# EAGLE board 02-PWR (EAGLE 9.6.2)
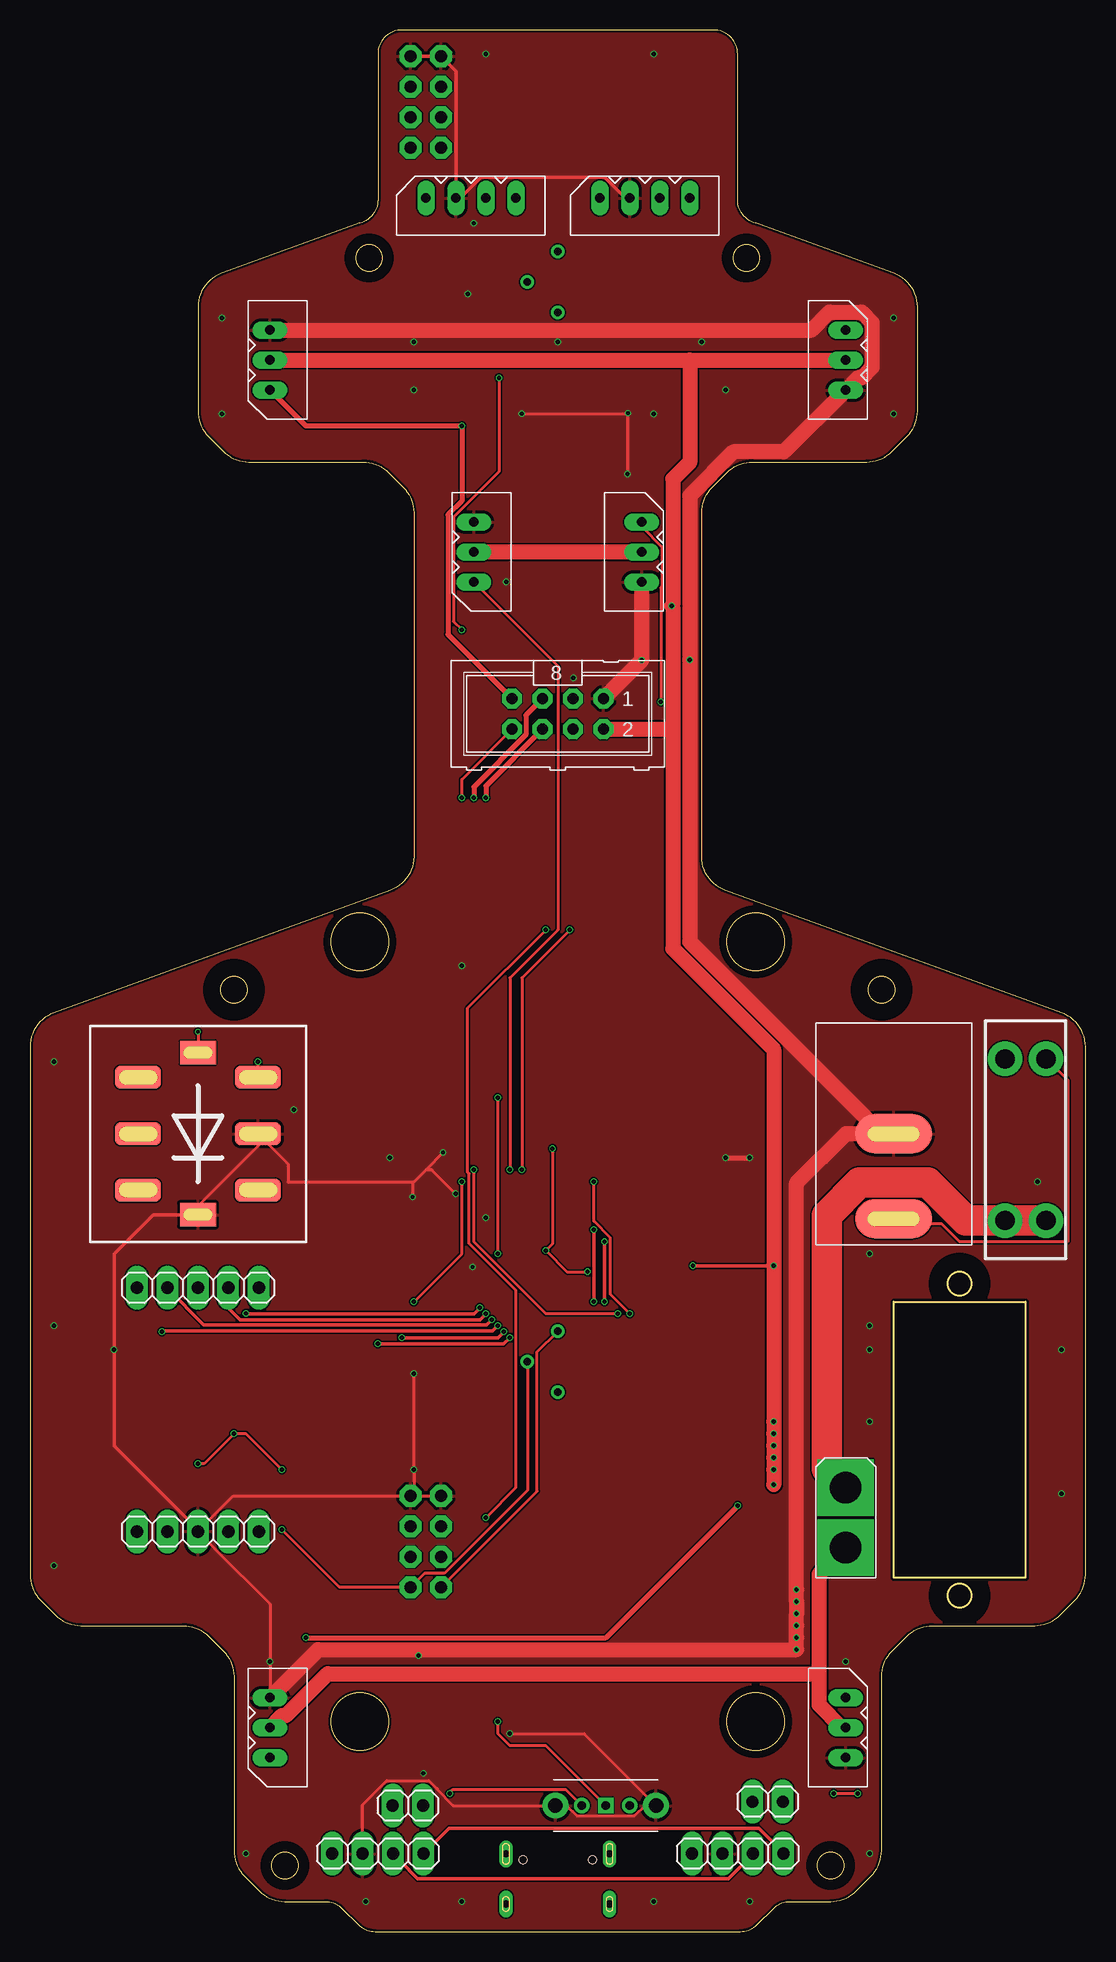
[diagram p0: board, top side]
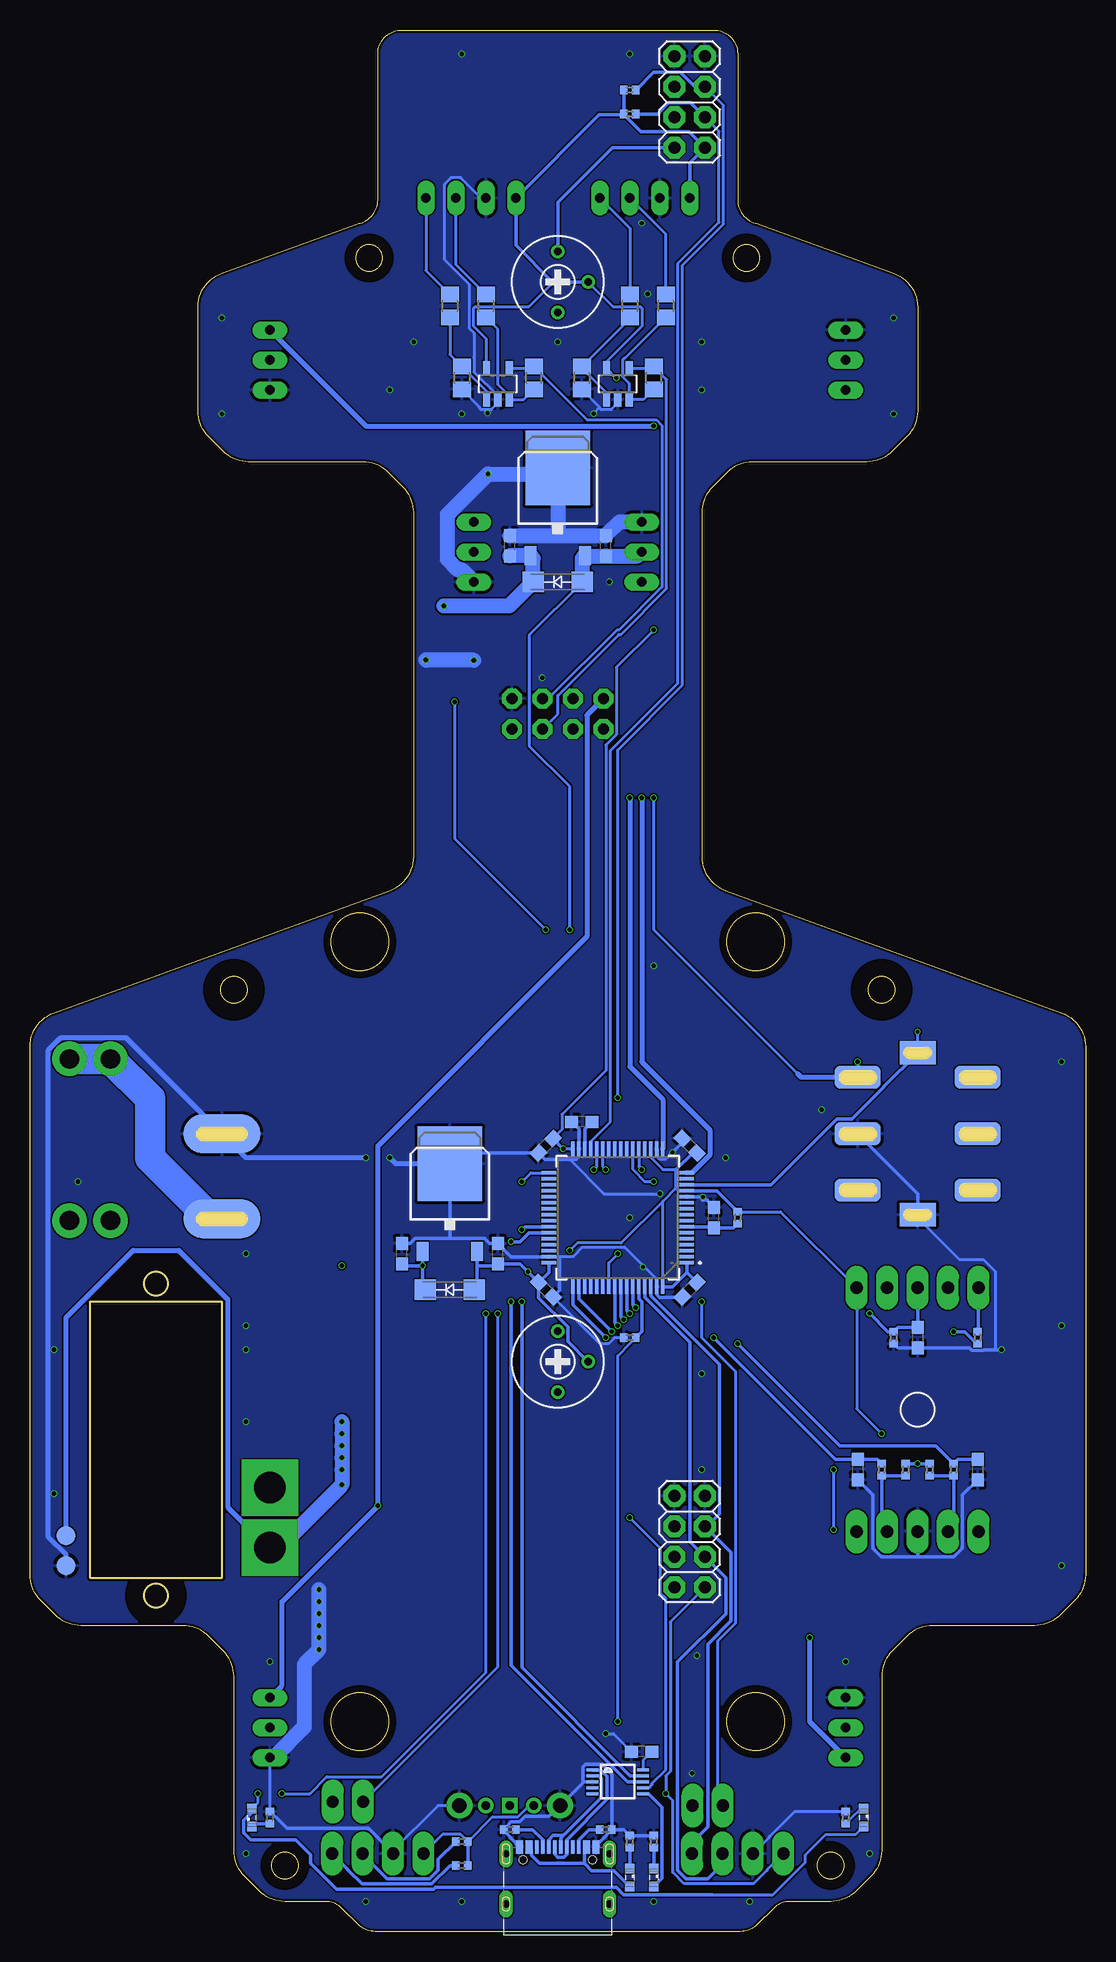
[diagram p1: board, bottom side, seen from below]

Size 88 x 158.5 mm. Coordinates in mm from the lower left corner, seen from the top.
Outline: 83,29.5 83,52.5 72,52.5 72,29.5 83,29.5
Outline: 27.36,0.59 arc45 28.78,0 59.22,0 arc45 60.64,0.59 61.96,1.91 arc-45 63.38,2.5 66.76,2.5 arc45 68.88,3.38 70.12,4.62 arc45 71,6.74 71,21.26 arc-45 71.88,23.38 73.12,24.62 arc-45 75.24,25.5 83.76,25.5 arc45 85.88,26.38 87.12,27.62 arc45 88,29.74 88,73.75 arc70 86.03,76.57 57.97,86.78 arc-70 56,89.6 56,118.26 arc-45 56.88,120.38 58.12,121.62 arc-45 60.24,122.5 69.76,122.5 arc45 71.88,123.38 73.12,124.62 arc45 74,126.74 74,135.4 arc70 72.03,138.22 60.76,142.32 arc5 60.49,142.4 arc-75 59,144.34 59,156.5 arc90 57,158.5 31,158.5 arc90 29,156.5 29,144.34 arc-75 27.51,142.4 arc5 27.24,142.32 15.97,138.22 arc70 14,135.4 14,126.74 arc45 14.88,124.62 16.12,123.38 arc45 18.24,122.5 27.76,122.5 arc-45 29.88,121.62 31.12,120.38 arc-45 32,118.26 32,89.6 arc-70 30.03,86.78 1.97,76.57 arc70 0,73.75 0,29.74 arc45 0.88,27.62 2.12,26.38 arc45 4.24,25.5 12.76,25.5 arc-45 14.88,24.62 16.12,23.38 arc-45 17,21.26 17,6.74 arc45 17.88,4.62 19.12,3.38 arc45 21.24,2.5 24.62,2.5 arc-45 26.04,1.91 27.36,0.59
Outline: circle at 77.5,28 radius 1
Outline: circle at 77.5,54 radius 1
Outline: circle at 60.5,17.5 radius 2.4
Outline: circle at 60.5,82.5 radius 2.4
Outline: circle at 71,78.5 radius 1.1
Outline: circle at 17,78.5 radius 1.1
Outline: circle at 28.27,139.5 radius 1.1
Outline: circle at 59.73,139.5 radius 1.1
Outline: circle at 66.76,5.5 radius 1.1
Outline: circle at 21.24,5.5 radius 1.1
Outline: circle at 27.5,17.5 radius 2.4
Outline: circle at 27.5,82.5 radius 2.4
Copper layers (1*16): Top 0.035mm / dielectric 1.6mm / Bottom 0.035mm
Design rules "jlcpcb-2layers *": minimum track width 5mil, minimum drill 0.3mm, track to track 5mil, track to pad 5mil, pad to pad 5mil, via to via 5mil, smd to smd 5mil, copper to edge 0.2mm, drill to drill 6mil, minimum pad ring 10mil, minimum via ring 3mil, stop-mask expansion 4mil, vias tented up to drill 20mil, thermal gap 10mil
Net classes: 0 default: width 0.254 mm
tRestrict: area 75,25.5 to 80,30.5; area 57.7,137.5 to 61.7,141.5; area 64.8,3.5 to 68.8,7.5; area 26.3,137.5 to 30.3,141.5; area 14.5,76 to 19.5,81; area 68.5,76 to 73.5,81; area 75,51.5 to 80,56.5; area 75,25.5 to 80,30.5; area 19.2,3.5 to 23.2,7.5; area 57.5,14.5 to 63.5,20.5; area 24.5,79.5 to 30.5,85.5; area 57.5,79.5 to 63.5,85.5
bRestrict: area 75,51.5 to 80,56.5; area 68.5,76 to 73.5,81; area 24.5,79.5 to 30.5,85.5; area 19.2,3.5 to 23.2,7.5; area 26.3,137.5 to 30.3,141.5; area 14.5,76 to 19.5,81; area 75,25.5 to 80,30.5; area 57.7,137.5 to 61.7,141.5; area 64.8,3.5 to 68.8,7.5; area 24.5,14.5 to 30.5,20.5; area 57.5,14.5 to 63.5,20.5; area 57.5,79.5 to 63.5,85.5

## Footprints (pad centres in the part's own frame; a part is rotated, then mirrored left to right if it is on the bottom)
SOT23-5 = smd 0.6 x 1.2: 1 -0.95,-1.306; 2 0,-1.306; 3 0.95,-1.306; 4 0.95,1.306; 5 -0.95,1.306
C0603 = smd 1.1 x 1: 1 -0.85,0; 2 0.85,0
ML6 = drill 0.914 octagon: 1 -3.81,-1.27; 2 -3.81,1.27; 3 -1.27,-1.27; 4 -1.27,1.27; 5 1.27,-1.27; 6 1.27,1.27; 7 3.81,-1.27; 8 3.81,1.27
SMA-DO214AC = smd 1.8 x 1.7: A -2.05,0; K 2.05,0
5267-3 = drill 0.8 long: P$1 0,0; P$2 2.5,0; P$3 5,0
5267-4 = drill 0.8 long: P$1 0,0; P$2 2.5,0; P$3 5,0; P$4 7.5,0
3557-2 = drill 1.6 pad 2.4: 1 -6.735,1.7; 2 6.735,1.7; 3 -6.735,-1.7; 4 6.735,-1.7
1X04 = drill 1.016 long: 1 -3.81,0; 2 -1.27,0; 3 1.27,0; 4 3.81,0
1X02 = drill 1.016 long: 1 -1.27,0; 2 1.27,0
2X04 = drill 1.016 octagon: 1 -3.81,-1.27; 2 -3.81,1.27; 3 -1.27,-1.27; 4 -1.27,1.27; 5 1.27,-1.27; 6 1.27,1.27; 7 3.81,-1.27; 8 3.81,1.27
1X05 = drill 1.016 long: 1 -5.08,0; 2 -2.54,0; 3 0,0; 4 2.54,0; 5 5.08,0
SML0603 = smd 0.8 x 0.8: A 0.75,0; C -0.75,0
R0805 = smd 1.3 x 1.5: 1 -0.95,0; 2 0.95,0
R0402 = smd 0.6 x 0.7: 1 -0.5,0; 2 0.5,0
RTRIM3339P = drill 0.61: 1 -2.54,0; 2 0,-2.54; 3 2.54,0
MYPARTS_D-PAK_TO252AA = smd 1 x 1.6: 1 -2.28,-4.8; 3 2.28,-4.8 | smd 5.4 x 6.2: 4 0,2.5
MYPARTS2_C01B02BKBK-EI = smd 3.251 x 6.452 bottom: PAD1-1 0,0; PAD1-4 -7.1,0 | smd 3.251 x 6.452: PAD1-2 0,0; PAD1-3 -7.1,0
TL22 = smd 3.81 x 1.93 bottom: 1_B 5,0; 1A_B 5,4.7; 1B_B 5,-4.7; 2_B -5,0; 2A_B -5,4.7; 2B_B -5,-4.7 | smd 3.81 x 1.93: 1_T 5,0; 1A_T 5,4.7; 1B_T 5,-4.7; 2_T -5,0; 2A_T -5,4.7; 2B_T -5,-4.7 | smd 3 x 1.93 bottom: L+_B 0,6.75; L-_B 0,-6.75 | smd 3 x 1.93: L+_T 0,6.75; L-_T 0,-6.75
SK-12D11VG3 = drill 0.7 square: 1 0,0 | drill 0.7: 2 -2,0; 3 2,0 | drill 1.2: 4 -4.2,0; 5 4.2,0
TP16R = smd 1.6 x 1.6: TP 0,0
LQFP64-10X10MM = smd 1.194 x 0.305: 1 -5.75,3.75; 2 -5.75,3.25; 3 -5.75,2.75; 4 -5.75,2.25; 5 -5.75,1.75; 6 -5.75,1.25; 7 -5.75,0.75; 8 -5.75,0.25; 9 -5.75,-0.25; 10 -5.75,-0.75; 11 -5.75,-1.25; 12 -5.75,-1.75; 13 -5.75,-2.25; 14 -5.75,-2.75; 15 -5.75,-3.25; 16 -5.75,-3.75; 33 5.75,-3.75; 34 5.75,-3.25; 35 5.75,-2.75; 36 5.75,-2.25; 37 5.75,-1.75; 38 5.75,-1.25; 39 5.75,-0.75; 40 5.75,-0.25; 41 5.75,0.25; 42 5.75,0.75; 43 5.75,1.25; 44 5.75,1.75; 45 5.75,2.25; 46 5.75,2.75; 47 5.75,3.25; 48 5.75,3.75 | smd 0.305 x 1.194: 17 -3.75,-5.75; 18 -3.25,-5.75; 19 -2.75,-5.75; 20 -2.25,-5.75; 21 -1.75,-5.75; 22 -1.25,-5.75; 23 -0.75,-5.75; 24 -0.25,-5.75; 25 0.25,-5.75; 26 0.75,-5.75; 27 1.25,-5.75; 28 1.75,-5.75; 29 2.25,-5.75; 30 2.75,-5.75; 31 3.25,-5.75; 32 3.75,-5.75; 49 3.75,5.75; 50 3.25,5.75; 51 2.75,5.75; 52 2.25,5.75; 53 1.75,5.75; 54 1.25,5.75; 55 0.75,5.75; 56 0.25,5.75; 57 -0.25,5.75; 58 -0.75,5.75; 59 -1.25,5.75; 60 -1.75,5.75; 61 -2.25,5.75; 62 -2.75,5.75; 63 -3.25,5.75; 64 -3.75,5.75
MSOP10 = smd 1 x 0.25: 1 -2.113,1; 2 -2.113,0.5; 3 -2.113,0; 4 -2.113,-0.5; 5 -2.113,-1; 6 2.113,-1; 7 2.113,-0.5; 8 2.113,0; 9 2.113,0.5; 10 2.113,1
XT-30 = drill 2.6 square: 1 2.5,0; 2 -2.5,0
USB_C_CUSB31-CFM2AX-01-X = smd 0.575 x 1.15: A1B12 -3.2,3.545; A4B9 -2.4,3.545; B1A12 3.2,3.545; B4A9 2.4,3.545 | smd 0.275 x 1.15: A5 -1.25,3.545; A6 -0.25,3.545; A7 0.25,3.545; A8 1.25,3.545; B5 1.75,3.545; B6 0.75,3.545; B7 -0.75,3.545; B8 -1.75,3.545 | drill 0.6 pad 1 long: M1 -4.32,2.97; M2 4.32,2.97; M3 -4.32,-1.21; M4 4.32,-1.21 | hole 0.65: 2.89,2.47; -2.89,2.47

## Placement (x,y rotation side)
AMP1  NJU77551F  [SOT23-5]  39,129 0 bottom
AMP2  NJU77551F  [SOT23-5]  49,129 0 bottom
C1  4.7µ  [C0603]  42,67.5 180 bottom
C2  0.1µ  [C0603]  45,53.5 315 bottom
C3  0.1µ  [C0603]  33,53.5 225 bottom
C4  0.1µ  [C0603]  33,65.5 135 bottom
C5  0.1µ  [C0603]  45,65.5 225 bottom
C6  0.1µ  [C0603]  19,38.5 270 bottom
C7  0.1µ  [C0603]  49,56.5 90 bottom
C8  1µ  [C0603]  57,56.5 90 bottom
C9  0.1µ  [C0603]  9,38.5 270 bottom
C10  0.1µ  [C0603]  14,49.5 270 bottom
C11  0.1µ  [C0603]  40,115.5 90 bottom
C14  0.1µ  [C0603]  37,15 180 bottom
C16  0.1µ  [C0603]  31,59.5 90 bottom
C17  1µ  [C0603]  48,115.5 90 bottom
CN1  ML8-R  [ML6]  44,101.5 180 top
D1  1N4001  [SMA-DO214AC]  53,53.5 180 bottom
D2  1N4001  [SMA-DO214AC]  44,112.5 180 bottom
J1  5267-3  [5267-3]  68,133.5 270 top
J2  5267-3  [5267-3]  20,14.5 90 top
J3  5267-3  [5267-3]  20,128.5 90 top
J4  5267-3  [5267-3]  68,19.5 270 top
J5  5267-4  [5267-4]  33,144.5 0 top
J6  5267-4  [5267-4]  47.5,144.5 0 top
J7  5267-3  [5267-3]  37,112.5 90 top
J8  5267-3  [5267-3]  51,117.5 270 top
J9  3557-2  [3557-2]  83,66 90 top
JP1  [1X04]  59,6.5 0 top
JP2  [1X02]  61.5,10.83 0 top
JP3  [1X04]  29,6.5 0 top
JP4  [1X02]  31.5,10.5 0 top
JP5  [2X04]  33,152.5 90 bottom
JP6  [2X04]  33,32.5 90 bottom
JP7  [1X05]  14,33.34 0 top
JP8  [1X05]  14,53.66 0 top
LED1  WHITE  [SML0603]  69.5,9.5 90 bottom
LED15  BLUE  [SML0603]  38,4.5 270 bottom
LED17  WHITE  [SML0603]  18.5,9.5 270 bottom
LED18  WHITE  [SML0603]  36,4.5 270 bottom
R1  1k  [R0805]  38,135.5 270 bottom
R2  1k  [R0805]  35,135.5 270 bottom
R3  330k  [R0805]  42,129.5 270 bottom
R4  330k  [R0805]  36,129.5 90 bottom
R5  1k  [R0805]  53,135.5 270 bottom
R6  1k  [R0805]  50,135.5 270 bottom
R7  330k  [R0805]  52,129.5 270 bottom
R8  330k  [R0805]  46,129.5 90 bottom
R9  10k  [R0402]  52,5.5 0 bottom
R10  10k  [R0402]  52,7.5 0 bottom
R11  5k1  [R0402]  48,8.5 180 bottom
R12  5k1  [R0402]  40,8.5 0 bottom
R13  270  [R0402]  38,7.5 270 bottom
R14  270  [R0402]  36,7.5 270 bottom
R15  270  [R0402]  68,9.5 270 bottom
R16  [RTRIM3339P]  44,137.5 90 bottom
R17  [RTRIM3339P]  44,47.5 90 bottom
R18  10k  [R0402]  38,153.5 180 bottom
R19  10k  [R0402]  38,151.5 180 bottom
R20  10k  [R0402]  9,49.5 270 bottom
R21  10k  [R0402]  17,38.5 90 bottom
R22  10k  [R0402]  11,38.5 270 bottom
R23  10k  [R0402]  13,38.5 270 bottom
R24  10k  [R0402]  15,38.5 270 bottom
R25  10k  [R0402]  16,49.5 270 bottom
R30  10k  [R0402]  29,59.5 270 bottom
R31  10k  [R0402]  38,49.5 180 bottom
R32  270  [R0402]  20,9.5 270 bottom
REG1  REG-3V3  [MYPARTS_D-PAK_TO252AA]  53,61.5 0 bottom
REG2  REG-5V  [MYPARTS_D-PAK_TO252AA]  44,119.5 0 bottom
SW1  MYPARTS2_C01B02BKBK-EI  [MYPARTS2_C01B02BKBK-EI]  72,66.5 90 top
SW2  TL22  [TL22]  14,66.5 0 top
SW3  SK-12D11VG3  [SK-12D11VG3]  48,10.5 180 top
TP1  PTR1TP16R  [TP16R]  85,33 0 bottom
TP2  PTR1TP16R  [TP16R]  85,30.5 0 bottom
U2  STM32F446RET6  [LQFP64-10X10MM]  39,59.5 180 bottom
U3  CH340ESMD  [MSOP10]  39,12.5 0 bottom
U$1  XT-30  [XT-30]  68,34.5 270 top
X2  usb-c  [USB_C_CUSB31-CFM2AX-01-X]  44,3.5 0 bottom

## Library data of the parts
AMP1 AMP2 = NJU77551F
C1-C11 C14 C16 C17 = rcl; SPICEPREFIX: C
CN1 = ML8
D1 D2 = diode
J1-J8 = con-molex-spox
J9 = 3557-15; DESCRIPTION: THM 2 in 1 Auto Blade Holder P/N 3557-2; HEIGHT: mm; MANUFACTURER_NAME: Keystone Electronics; MANUFACTURER_PART_NUMBER: 3557-2; MOUSER_PART_NUMBER: 534-3557-2; MOUSER_PRICE-STOCK: https://www.mouser.co.uk/ProductDetail/Keystone-Electronics/3557-2?qs=cxy41lVAGV%2FfbyASjpXK1g%3D%3D
JP1-JP8 = pinhead
LED1 LED15 LED17 LED18 = led
R1-R15 R18-R25 R30-R32 = rcl; SPICEPREFIX: R
R16 R17 = rcl; SPICEMODEL: X; SPICEPREFIXL: POT
REG1 REG2 = #001-line
SW1 = #004-high_voltage
SW2 = TL22
SW3 = Slide Switch
TP1 TP2 = testpad
U2 = F446RE; COPYRIGHT: Copyright (C) 2022 Ultra Librarian. All rights reserved.; MANUFACTURER_PART_NUMBER: STM32F446RET6; MFR_NAME: STMicroelectronics
U3 = CH340E
U$1 = XT-30
X2 = microbuilder

## Nets
+3V3: AMP1.5 AMP2.5 C2.1 C3.1 C4.1 C5.1 C7.1 D1.A J5.P$1 J6.P$1 JP1.1 JP3.1 JP5.1 JP6.1 JP8.5 R9.2 R10.2 R16.2 R17.2 R18.2 R19.2 R23.1 R24.1 R30.1 REG1.3 SW3.3 U2.1 U2.13 U2.19 U2.32 U2.48 U2.64
+5V: C11.1 D2.A J7.P$2 J8.P$2 REG2.3 U3.7
BOOT0: R31.1 SW3.1 U2.60
CTS: U3.5
D+: U3.1 X2.A6 X2.B6
D-: U3.2 X2.A7 X2.B7
ENC_A: C9.1 R22.1 U2.49
ENC_B: C6.1 R21.2 U2.50
ENC_SW: C10.1 JP8.3 R25.1 U2.59
GND: AMP1.2 AMP2.2 C1.2 C2.2 C3.2 C4.2 C5.2 C6.2 C7.2 C8.2 C9.2 C10.2 C11.2 C14.2 C16.2 C17.2 CN1.1 J1.P$3 J2.P$3 J3.P$3 J4.P$3 J5.P$2 J6.P$2 J7.P$3 J8.P$3 JP1.2 JP3.2 JP5.7 JP5.8 JP6.7 JP6.8 JP7.3 R3.2 R7.2 R11.2 R12.2 R13.1 R14.1 R15.1 R25.2 R31.2 R32.1 REG1.4 REG2.4 SW1.PAD1-1 SW1.PAD1-2 SW2.1_B SW2.1_T SW2.L-_B SW2.L-_T SW3.4 SW3.5 TP2.TP U2.12 U2.18 U2.31 U2.47 U2.63 U3.3 X2.A1B12 X2.B1A12
KIT_L: J7.P$1 U2.27
KIT_R: J8.P$1 U2.28
LED-WHITE: LED1.A LED17.A U2.33
LED_B: JP8.4 U2.58
LED_G: JP8.2 U2.57
LED_R: R20.2 U2.56
LOADCELL-L: AMP1.4 CN1.4 R4.2
LOADCELL-R: AMP2.4 CN1.3 R8.2
MCU_RX-SUB_TX: CN1.5 U2.16
MCU_TX-SUB_RX: CN1.6 U2.17
N$1: J5.P$3 R2.1
N$2: J5.P$4 R1.1
N$3: AMP1.3 R2.2 R4.1
N$4: AMP1.1 R1.2 R3.1
N$5: J6.P$3 R6.1
N$6: J6.P$4 R5.1
N$7: AMP2.3 R6.2 R8.1
N$8: AMP2.1 R5.2 R7.1
N$9: J9.1 J9.3 U$1.2
N$10: J9.2 J9.4 SW1.PAD1-3 SW1.PAD1-4
N$11: C14.1 U3.10
N$12: LED1.C R15.2
N$13: JP5.2 R16.3
N$14: R11.1 X2.A5
N$15: R12.1 X2.B5
N$16: LED15.C R13.2
N$17: JP6.2 R17.3
N$18: C1.1 U2.30
N$19: LED18.A U3.6
N$20: LED18.C R14.2
N$21: JP7.4 R21.1 R24.2
N$22: JP7.2 R22.2 R23.2
N$23: JP8.1 R20.1
N$32: LED17.C R32.2
N$49: LED15.A X2.A4B9 X2.B4A9
NRST: C16.1 R30.2 U2.7
RTS: U3.4
SCL: JP1.3 JP3.3 JP6.3 R10.1 U2.61
SCL2: JP5.3 R19.1 U2.29
SDA: JP1.4 JP3.4 JP6.5 R9.1 U2.62
SDA2: JP5.5 R18.1 U2.55
SERVO-SIG: CN1.7 J1.P$1 J2.P$1 J3.P$1 J4.P$1
TOGGLE: CN1.8 SW2.1A_B SW2.1A_T
TOGGLE_LED: SW2.L+_B SW2.L+_T U2.14
UART1-RX: U2.43 U3.8
UART1-TX: U2.42 U3.9
VDD: C8.1 C17.1 CN1.2 D1.K D2.K J1.P$2 J2.P$2 J3.P$2 J4.P$2 REG1.1 REG2.1 TP1.TP U$1.1
XSHUT1: JP2.1 U2.21
XSHUT2: JP4.1 U2.22

## Tracks (layer width: path | path; a pad name or v marks a point on that pad's centre or on a via)
+3V3  (via drill 0.35)
  Top 0.254: v46.47,55 44.76,55 v43,56.75 43.55,57.3 v43.55,65.25 | v35,11.5 35,11.59 35.25,11.83 44.67,11.83 SW3.3 | v14,39 14.5,39 v17,41.5 18,41.5 v21,38.5 | v21,33.5 25.81,28.69 JP6.1 32.9,29.86 34.55,29.86 41.46,36.77 R17.2 | v36,108.5 35.31,109.2 35.31,117.9 39.11,121.71 v39.11,129.5
  Bottom 0.254: U2.64 35.25,60.86 | 34.13,61.98 35.25,60.86 | 35.25,60.86 38.72,57.39 42.37,57.39 v43,56.75 | JP3.1 26.56,5.13 26.56,5.1 27.68,3.98 33.47,3.98 34.41,4.92 34.41,10.91 v35,11.5 35,12.96 34.62,13.34 34.62,25.8 JP6.1 | SW3.3 46.38,10.5 47.34,9.54 49.46,9.54 R10.2 51.95,7.95 52.09,8.1 53.59,8.1 JP1.1 | v17,41.5 19.08,43.58 JP8.5 25.42,60 R30.1 | v21,33.5 v21,38.5 | 42,137.5 44.36,137.5 46.4,135.45 50.86,135.45 51,135.31 51,133.8 49.95,132.74 AMP2.5 | R16.2 39.41,135.45 37.14,135.45 37,135.31 37,133.8 39.95,130.84 AMP1.5 39.14,129.5 v39.11,129.5 | U2.19 36.25,64.53 35.24,63.52 34.13,63.52 | 43,65.25 v43.55,65.25 | v36,108.5 39.11,105.39 39.11,99.78 40,98.9 40,71.76 43.65,68.11 43.65,66.85 C5.1 | 46.5,55 v46.47,55
  Bottom 0.305: R23.1 v14,39 R24.1 | R9.2 R10.2 | C2.1 44.75,54.95 U2.48 | REG1.3 50.72,55.5 | 50.72,55.5 50.72,53.73 D1.A | 50.72,55.5 49.15,55.5 C7.1 47.15,55.65 46.5,55 C2.1 | R18.2 R19.2 38.5,151.45 | 38.5,151.45 37.08,150.04 33.08,150.04 JP5.1 33,147.42 J5.P$1 | R16.2 42,137.5 44.45,137.5 47.5,140.56 J6.P$1 40.55,151.45 38.5,151.45 | C5.1 | C5.1 v43.55,65.25 | U2.32 43,65.25 | C4.1 32.74,64.9 34.13,63.52 34.13,61.98 33.89,61.75 U2.13 30.75,61.75 R30.1 | U2.1 33.25,54.95 | 33.25,54.95 C3.1 | U2.64 34.45,53.75 33.25,54.95 | C2.1 45.6,52.83 43.16,50.39 43.16,49.2 R17.2
+5V  (via drill 0.35)
  Top 0.254: v43,83.5 36.49,77 36.49,63.29 36.62,63.17 36.62,57.34 40.51,53.46 40.51,37.01 v38,34.5
  Top 1.27: J8.P$2 J7.P$2
  Bottom 0.254: U3.7 36.4,12 36.13,12.27 36.13,12.37 35,13.5 35,27.77 35.44,28.21 35.44,31.94 v38,34.5 | D2.A 46.35,108.1 46.35,98.78 43,95.44 v43,83.5
  Bottom 1.27: D2.A 41.95,114.47 REG2.3 41.67,114.65 C11.1 37.35,114.65 J7.P$2
BOOT0  (via drill 0.35)
  Top 0.254: SW3.1 43,15.5 40,15.5 39,16.5 v39,17.5
  Bottom 0.254: R31.1 37.95,49.05 39,47.99 v39,17.5
  Bottom 0.305: U2.60 37.25,52.75 36.97,52.47 36.97,50.03 R31.1
D+
  Bottom 0.305: U3.1 41.05,13.43 40.41,13.43 39.9,12.92 39.9,11 43.25,7.65 X2.B6 43.25,6.44 43.5,6.19 44,6.19 44.25,6.44 X2.A6
D-
  Bottom 0.305: X2.A7 43.75,7.76 43.51,8.01 | U3.2 40.59,13 40.33,12.74 40.33,11.18 43.51,8.01 | X2.B7 44.75,7.65 44.4,8.01 43.51,8.01
ENC_A  (via drill 0.35)
  Top 0.305: v29,49 30.75,49 30.78,48.97 39.47,48.97 v40,49.5
  Bottom 0.305: C9.1 10.65,39.35 R22.1 12.5,40.5 20.5,40.5 v29,49 | U2.49 42.75,52.25 v40,49.5
ENC_B  (via drill 0.35)
  Top 0.305: v39.5,50 39,49.5 v31,49.5
  Bottom 0.305: R21.2 17.35,39.35 C6.1 20.85,39.35 v31,49.5 | U2.50 42.25,52.75 v39.5,50
ENC_SW  (via drill 0.35)
  Top 0.305: v37.5,52 37,51.5 18.03,51.5 v18,51.53
  Bottom 0.305: JP8.3 C10.1 15.65,50.35 R25.1 16.47,50 v18,51.53 | U2.59 37.75,52.25 v37.5,52
GND  (via drill 0.35)
  Top 0.254: 32,36.31 JP6.7 16.94,36.31 15.37,34.74 15.37,34.71 14.08,33.42 JP7.3 15.37,31.97 15.37,31.94 20,27.31 J2.P$3 | 32,36.31 JP6.8 | 32,36.31 v32,38.5 v32,46.5 | v40,16.5 46.2,16.5 SW3.4 51.25,10.5 50.37,9.62 45.63,9.62 44.75,10.5 SW3.5 35.29,10.5 33.94,11.85 33.94,11.9 33.25,12.58 29.75,12.58 27.73,10.57 JP3.2 | v41,126.51 49.81,126.51 v49.86,126.55 49.82,126.51 v49.82,121.5 | v34.43,64.93 33,63.5 | 33,63.5 32,62.5 | 32,62.5 31.9,62.4 v31.9,61.22 | v35.49,61.5 33.49,63.5 33,63.5 | 32,62.5 21.5,62.5 21.5,64 19.5,66 | 19.5,66 14,60.5 SW2.L-_T | 19.5,66 SW2.1_B
  Top 0.305: JP5.7 JP5.8 35.5,155.08 J5.P$2 35.87,144.5 37.59,146.22 47.91,146.22 49.63,144.5 J6.P$2 | SW2.L-_T 10.25,59.75 7,56.5 v7,48.5 7,40.5 14.08,33.42
  Top 0.406: v58,64.5 v60,64.5
  Top 1.27: J2.P$3 24,23.5 v63.9,23.5 v63.9,24.5 v63.9,25.5 v63.9,26.5 v63.9,27.5 v63.9,28.5 63.9,62.4 68,66.5 71,66.5 | SW1.PAD1-2 71,66.5 | CN1.1 v51,105.96 J8.P$3 | J3.P$3 65.18,133.5 66.67,134.98 69.33,134.98 70.2,134.11 70.2,130.39 69.33,129.52 69.02,129.52 J1.P$3 62.84,123.34 58.65,123.34 55,119.68 v55,106 55,82.5 71,66.5
  Bottom 0.254: AMP1.2 39,127.38 39.55,126.84 40.35,126.84 40.5,126.99 40.5,127.05 | 40.5,127.05 R3.2 | 50.14,126.84 49.55,126.84 49,127.38 AMP2.2 49,128 51,130 51,131.2 51,131.21 51,133.25 51.38,133.64 51.38,137.3 53.47,139.38 53.47,145.62 52.9,146.19 52.1,146.19 50.4,144.5 J6.P$2 | 50.14,126.84 50.36,126.84 50.5,126.99 50.5,127.05 R7.2 | U2.63 35.75,54.36 38.4,57 41.99,57 42.75,56.25 44.11,56.25 | JP3.2 26.36,7.87 26.36,7.9 24.26,10 R32.1 | v40,16.5 39.35,16.5 C14.2 | SW3.4 54,10.5 57.83,6.67 | R31.2 39.29,49.5 39.79,48.99 40.49,48.99 C2.2 | 40.5,127.05 41,126.56 v41,126.51 | v49.86,126.55 50.14,126.84 | R15.1 68,14.18 67.68,14.5 | U2.18 35.71,65.21 35.71,64.6 35.51,64.4 34.99,64.4 34.46,64.93 v34.43,64.93 | 43,64.37 40.13,61.5 v35.49,61.5 | 31.57,60.92 31.5,61 32,61 v31.9,61.22 | 14,59.5 10.5,56 8.5,56 7.5,55 7.5,48.5 | 39.92,116.42 40,116.5 C11.2 | REG2.4 44,121.5
  Bottom 0.305: U3.3 41.8,12.5 41.89,12.41 | 41.89,12.41 SW3.5 44.71,9.59 46.72,9.59 47.18,9.13 47.92,9.13 48.08,8.97 48.08,8.92 R11.2 48.5,8.38 47.49,7.37 47.49,7.33 X2.A1B12 | R14.1 R13.1 38.5,8.5 R12.2 | R12.2 39.92,8.08 39.92,8.03 40.8,7.16 X2.B1A12 | R12.2 39.47,8.53 39.47,13.1 40.3,13.93 41.7,13.93 41.89,13.74 41.89,12.41 | C6.2 17.73,36.38 17.73,31.93 17.03,31.23 14,31.23 | 14,31.23 10.97,31.23 10.27,31.93 10.27,36.38 C9.2 | JP7.3 14,31.23 | R25.2 15.65,48.65 C10.2 9.7,48.65 9.47,48.42 8.53,48.42 8.45,48.5 7.5,48.5 v7,48.5 | R15.1 67.58,9.58 67.53,9.58 66.56,8.61 59.78,8.61 57.83,6.67 57.73,6.56 JP1.2 | C2.2 43.87,53.42 43.87,56.02 44.11,56.25 U2.47 47.9,56.25 C7.2 49.67,57.35 50.1,57.78 53,57.78 | C8.2 56.33,57.35 55.9,57.78 53,57.78 | 53,57.78 REG1.4 52.1,64.9 C5.2 45.08,64.37 43,64.37 42.48,64.37 42.25,64.61 U2.31 42.25,66.9 C1.2 | v34.43,64.93 33.6,65.75 C4.2 | U2.63 35.75,53.11 35.52,52.87 33.6,52.87 C3.2 | SW2.1_B 14,61.5 SW2.L-_T 14,59.5 | C16.2 31.57,60.92 31.9,61.25 U2.12
  Bottom 0.406: REG1.4 57.5,64 v58,64.5 | v60,64.5 70,64.5 SW1.PAD1-2 80,74.5 85.43,74.5 86.47,73.47 86.47,32.87 85,31.4 TP2.TP
  Bottom 1.27: J4.P$3 67.68,14.5 65.14,17.05 65.14,22.27 v63.9,23.5 v63.9,24.5 v63.9,25.5 v63.9,26.5 v63.9,27.5 v63.9,28.5 | C17.2 44,116.35 | 44,116.35 C11.2 | 44,116.35 44,121.5 v49.82,121.5 53.2,118.11 53.2,114.39 52.33,113.52 52.02,113.52 J8.P$3 | v51,105.96 54.96,105.96 v55,106 | J7.P$3 38.85,117.5 39.92,116.42
  other vias: 16,134.5 16,126.5 72,134.5 72,126.5 38,156.5 52,156.5 52,126.5 58,128.5 32,128.5 32,132.5 44,132.5 56,132.5 2,72.5 2,30.5 2,50.5 86,48.5 86,36.5 84,62.5 70,42.5 70,56.5 70,48.5 70,50.5 20,22.5 68,22.5 60,2.5 28,2.5 52,2.5 36,2.5 18,6.5 70,6.5 36.9,55.4 38,59.5 22,68.5 36,80.5 30,64.5 32.4,23 32.8,13.2 39.7,112.5 45.3,104.5 37,142.4 36.5,136.5
  pour Bottom: -6,162.5 94,162.5 94,-7.5 -6,-7.5
  pour Top: -6,162.5 94,162.5 94,-7.5 -6,-7.5
KIT_L  (via drill 0.35)
  Top 0.254: J7.P$1 44,105.5 44,83.5 40,79.5 v40,63.5
  Bottom 0.254: v40,63.5 40.25,63.75 U2.27
KIT_R  (via drill 0.35)
  Top 0.254: J8.P$1 51,117.1 52.69,115.4 52.69,112.1 52.59,111.99 v52.59,102.5 | v41,63.5 41,79.5 v45,83.5
  Bottom 0.254: v52.59,102.5 52.59,91.09 v45,83.5 | v41,63.5 40.75,63.75 U2.28
LED-WHITE  (via drill 0.35)
  Top 0.254: v69,11.5 v67,11.5 | v47,62.5 47,59.21 48.39,57.83 48.39,53.11 v50,51.5
  Bottom 0.254: 31.1,3.07 26.05,3.07 23.37,5.75 23.37,6.38 21.66,8.1 19.15,8.1 LED17.A | LED1.A 69,10.75 v69,11.5 | v67,11.5 64.66,11.5 63.25,12.91 58.69,12.91 50,21.59 v50,51.5 | v47,62.5 46.25,63.25 U2.33
  Bottom 0.305: 31.1,3.07 38.52,3.07 39.12,3.68 54.19,3.68 54.34,3.53 62.44,3.53 64.6,5.69 64.6,6.39 65.87,7.65 69.6,7.65 70.18,8.23 70.18,9.27 69.5,9.94 LED1.A
LED_B  (via drill 0.35)
  Top 0.305: JP8.4 16.54,51.96 17.5,51 37.5,51 v38,51.5
  Bottom 0.305: U2.58 38.25,51.75 v38,51.5
LED_G  (via drill 0.35)
  Top 0.305: JP8.2 11.46,53.6 14.49,50.57 38.07,50.57 v38.5,51
  Bottom 0.305: U2.57 38.75,51.25 v38.5,51
LED_R  (via drill 0.35)
  Top 0.305: v39,50.5 38.57,50.07 11.07,50.07 v11,50 | v39,50.5
  Bottom 0.305: v39,50.5 39.25,50.75 U2.56 | R20.2 9.05,49 10.05,50 v11,50
LOADCELL-L
  Bottom 0.254: AMP1.4 36.14,130.31 R4.2 34.92,129.38 34.92,111.94 38.74,108.12 38.9,108.12 44,103.02 44,101.5 CN1.4
LOADCELL-R
  Bottom 0.254: AMP2.4 46.14,130.31 R8.2 41.55,126 35.79,126 35.31,125.52 35.31,112.1 38.9,108.5 39.06,108.5 44.79,102.77 CN1.3
MCU_RX-SUB_TX  (via drill 0.35)
  Top 0.406: CN1.5 41.34,101.38 41.34,99.75 37,95.41 v37,94.5
  Bottom 0.406: v37,94.5 37,72.5 31.33,66.83 31.33,64.73 32.8,63.25 U2.16
MCU_TX-SUB_RX  (via drill 0.35)
  Top 0.406: CN1.6 38,95.5 v38,94.5
  Bottom 0.406: v38,94.5 38,72.09 35.25,69.34 U2.17
N$1
  Bottom 0.254: R2.1 35,141.5 J5.P$3
N$2
  Bottom 0.254: J5.P$4 38,142 R1.1
N$3
  Bottom 0.254: R4.1 36.86,127.69 AMP1.3 38.05,129.05 38.6,129.6 38.6,131.01 38.45,131.16 38.39,131.16 R2.2
N$4
  Bottom 0.254: R1.2 38,134.45 R3.1 42,130.31 39.95,128.26 AMP1.1
N$5
  Bottom 0.254: R6.1 52.5,138.95 J6.P$3
N$6
  Bottom 0.254: J6.P$4 55,138.45 R5.1
N$7
  Bottom 0.254: R6.2 49,133.55 49,128.95 48.05,128 AMP2.3 46.86,127.69 R8.1
N$8
  Bottom 0.254: R5.2 53,131.45 R7.1 49.95,128.4 AMP2.1
N$9
  Top 2.54: J9.3 J9.1 78.01,59.27 74.85,62.42 69.15,62.42 66.43,59.71 66.43,38.57 U$1.2
N$10
  Top 0.254: SW1.PAD1-3 72,59 76,59 77.5,57.5 86.5,57.5 86.5,71 85,72.5 J9.4
  Bottom 0.254: SW1.PAD1-3 72,59.5 73,59.5
  Bottom 2.54: J9.4 J9.2 78,69.44 78,64.5 73,59.5
N$11
  Bottom 0.254: C14.1 36.89,14.26 U3.10
N$12
  Bottom 0.305: R15.2 69.25,9 LED1.C
N$13
  Bottom 0.305: JP5.2 39.44,148.69 44,144.13 R16.3
N$14
  Bottom 0.305: X2.A5 45.25,7.65 46.1,8.5 R11.1
N$15
  Bottom 0.305: X2.B5 42.25,7.65 41.4,8.5 R12.1
N$16
  Bottom 0.305: R13.2 LED15.C
N$17
  Top 0.254: R17.3 42.27,48.31 42.27,36.69 JP6.2
N$18
  Bottom 0.305: C1.1 41.75,66.9 U2.30
N$19
  Bottom 0.305: LED18.A 35.32,4.43 35.32,10.37 36.45,11.5 U3.6
N$20
  Bottom 0.305: LED18.C R14.2
N$21
  Bottom 0.305: JP7.4 17,33.8 R21.1 R24.2
N$22
  Bottom 0.305: JP7.2 11,33.8 R22.2 R23.2
N$23
  Bottom 0.305: R20.1 8.92,50.08 JP8.1
N$32
  Bottom 0.254: R32.2 19.55,9.45 18.74,10.25 LED17.C
N$49
  Bottom 0.305: LED15.A 39.33,5.08 41.18,5.08 41.79,5.69 | 41.79,5.69 41.79,6.86 X2.B4A9 | X2.A4B9 46.17,6.81 46.17,6.35 45.5,5.69 41.79,5.69
NRST
  Bottom 0.305: R30.2 29.35,58.65 C16.1 31,58.75 U2.7
SCL
  Top 0.305: JP3.3 31.62,5.15 31.62,5.09 32.32,4.39 58.22,4.39 60.27,6.44 JP1.3
  Bottom 0.305: JP3.3 30.27,5.59 31.46,4.39 33.3,4.39 34,5.09 34,22.5 30,26.5 30,29.5 JP6.3 33,32.5 33,49.11 36.75,52.86 U2.61 | R10.1 54,6 54,5.09 54.7,4.39 58.22,4.39 60.27,6.44 JP1.3
SCL2
  Bottom 0.254: U2.29 41.25,65.86 39.62,67.49 39.62,98.42 34,104.04 34,139.04 30.56,142.48 30.56,150.06 JP5.3
  Bottom 0.305: R19.1 35.69,151.5 34.76,152.42 32.92,152.42 JP5.3
SDA
  Top 0.305: JP3.4 34.92,8.61 60.76,8.61 62.81,6.56 JP1.4
  Bottom 0.305: JP3.4 32.81,7.41 31.5,8.72 31.5,23.95 29.57,25.88 29.57,31.61 JP6.5 31.58,33.77 30.54,34.82 30.54,47.26 36.25,52.97 U2.62 | JP1.4 61.46,5.15 61.46,5.09 60.33,3.96 54.52,3.96 52.98,5.5 R9.1
SDA2  (via drill 0.35)
  Top 0.254: v39,56.5 v39,69.5
  Bottom 0.254: U2.55 39.75,55.75 v39,56.5 | v39,69.5 39,98.5 33.62,103.89 33.62,138.88 30.18,142.32 30.18,152.22 JP5.5
  Bottom 0.305: JP5.5 32.58,153.77 33.78,154.96 36.04,154.96 R18.1
SERVO-SIG  (via drill 0.35)
  Top 0.406: v23,24.5 48,24.5 v59,35.5 | J3.P$1 23,125.5 v36,125.5 36,119.24 34.85,118.09 34.85,108.11 CN1.7
  Bottom 0.406: J4.P$1 67,20.5 67,27.5 v59,35.5 59,65.5 41.58,82.92 41.58,101.38 CN1.7 | J2.P$1 23,17.5 v23,24.5 | J1.P$1 60,125.5 v36,125.5
TOGGLE  (via drill 0.35)
  Top 0.254: v36,94.5 36,96.04 CN1.8 | SW2.1A_B v19,72.5
  Bottom 0.254: 24,71.5 36,83.5 v36,94.5 | v19,72.5 SW2.1A_B
  Bottom 0.406: SW2.1A_B 23.7,71.2 24,71.5
TOGGLE_LED  (via drill 0.3)
  Top 0.254: v14,75 SW2.L+_B
  Bottom 0.254: SW2.L+_B v14,75
  Bottom 0.305: SW2.L+_B 16.82,70.43 16.82,70.4 19.47,67.75 20.74,67.75 26.24,62.25 U2.14
UART1-RX  (via drill 0.35)
  Top 0.305: v47.88,52.5 v47.88,57.5
  Bottom 0.305: U3.8 38.2,12.5 47.88,22.18 v47.88,52.5 | U2.43 46.39,58.25 47.14,57.5 v47.88,57.5
UART1-TX  (via drill 0.35)
  Top 0.305: v47,52.5 v47,58.5
  Bottom 0.305: U3.9 38,13 47,22 v47,52.5 | U2.42 46.75,58.75 v47,58.5
VDD  (via drill 0.35)
  Top 0.305: v62,55.5 v55.28,55.5
  Top 1.27: J4.P$2 67.98,17.02 67.67,17.02 65.8,18.89 65.8,21.5 | 65.8,21.5 65.8,29.8 U$1.1 | J2.P$2 21.02,18.02 21.33,18.02 24.82,21.5 65.8,21.5 | J3.P$2 55,131 | 55,131 J1.P$2 | v62,37.24 v62,38.5 v62,39.5 v62,40.5 v62,41.5 v62,42.5 v62,55.5 62,73.52 53.6,81.92 53.6,100.23 | CN1.2 53.6,100.23 | 55,131 55,122.48 53.6,121.08 53.6,110.6 v53.5,110.5 53.6,110.4 53.6,100.23
  Bottom 0.305: REG1.1 v55.28,55.5 | v55.28,55.5 55.28,53.73 D1.K | C8.1 56.85,55.5 v55.28,55.5
  Bottom 0.406: U$1.1 69,33 69.15,33 71.52,35.37 71.52,52.7 75.6,56.78 79.4,56.78 85,51.18 TP1.TP
  Bottom 1.27: U$1.1 67.24,32 v62,37.24 v62,38.5 v62,39.5 v62,40.5 v62,41.5 v62,42.5 | C17.1 47.95,114.7 REG2.1 46.05,114.47 D2.K 48.05,110.5 v53.5,110.5
XSHUT1  (via drill 0.35)
  Top 0.254: v49,51.5 43,51.5 37,57.5 v37,63.5
  Bottom 0.254: JP2.1 49,22.05 v49,51.5 | U2.21 37.25,63.75 v37,63.5
XSHUT2  (via drill 0.35)
  Top 0.254: v32,52.5 36,56.5 v36,62.5
  Bottom 0.254: JP4.1 30.23,10.71 30.63,11.11 30.63,24.24 29.16,25.71 29.16,46.66 32,49.5 v32,52.5 | v36,62.5 36.71,62.5 37.75,63.54 U2.22